# Altium PCB BEE-DAL_EXP.PcbDoc (part 5 of 5)
Units mm, origin at the board's own origin, x right, y up, seen from the top; angles counter-clockwise.
Board outline 93 x 90 mm, 6 copper layers (L1 TOP, L2 GND, L3 SIGNAL, L4 PWR, L5 GND, L6 BOT), stack 1.516 mm thick; 548 components, 447 nets, 1827 pads, 1142 vias.
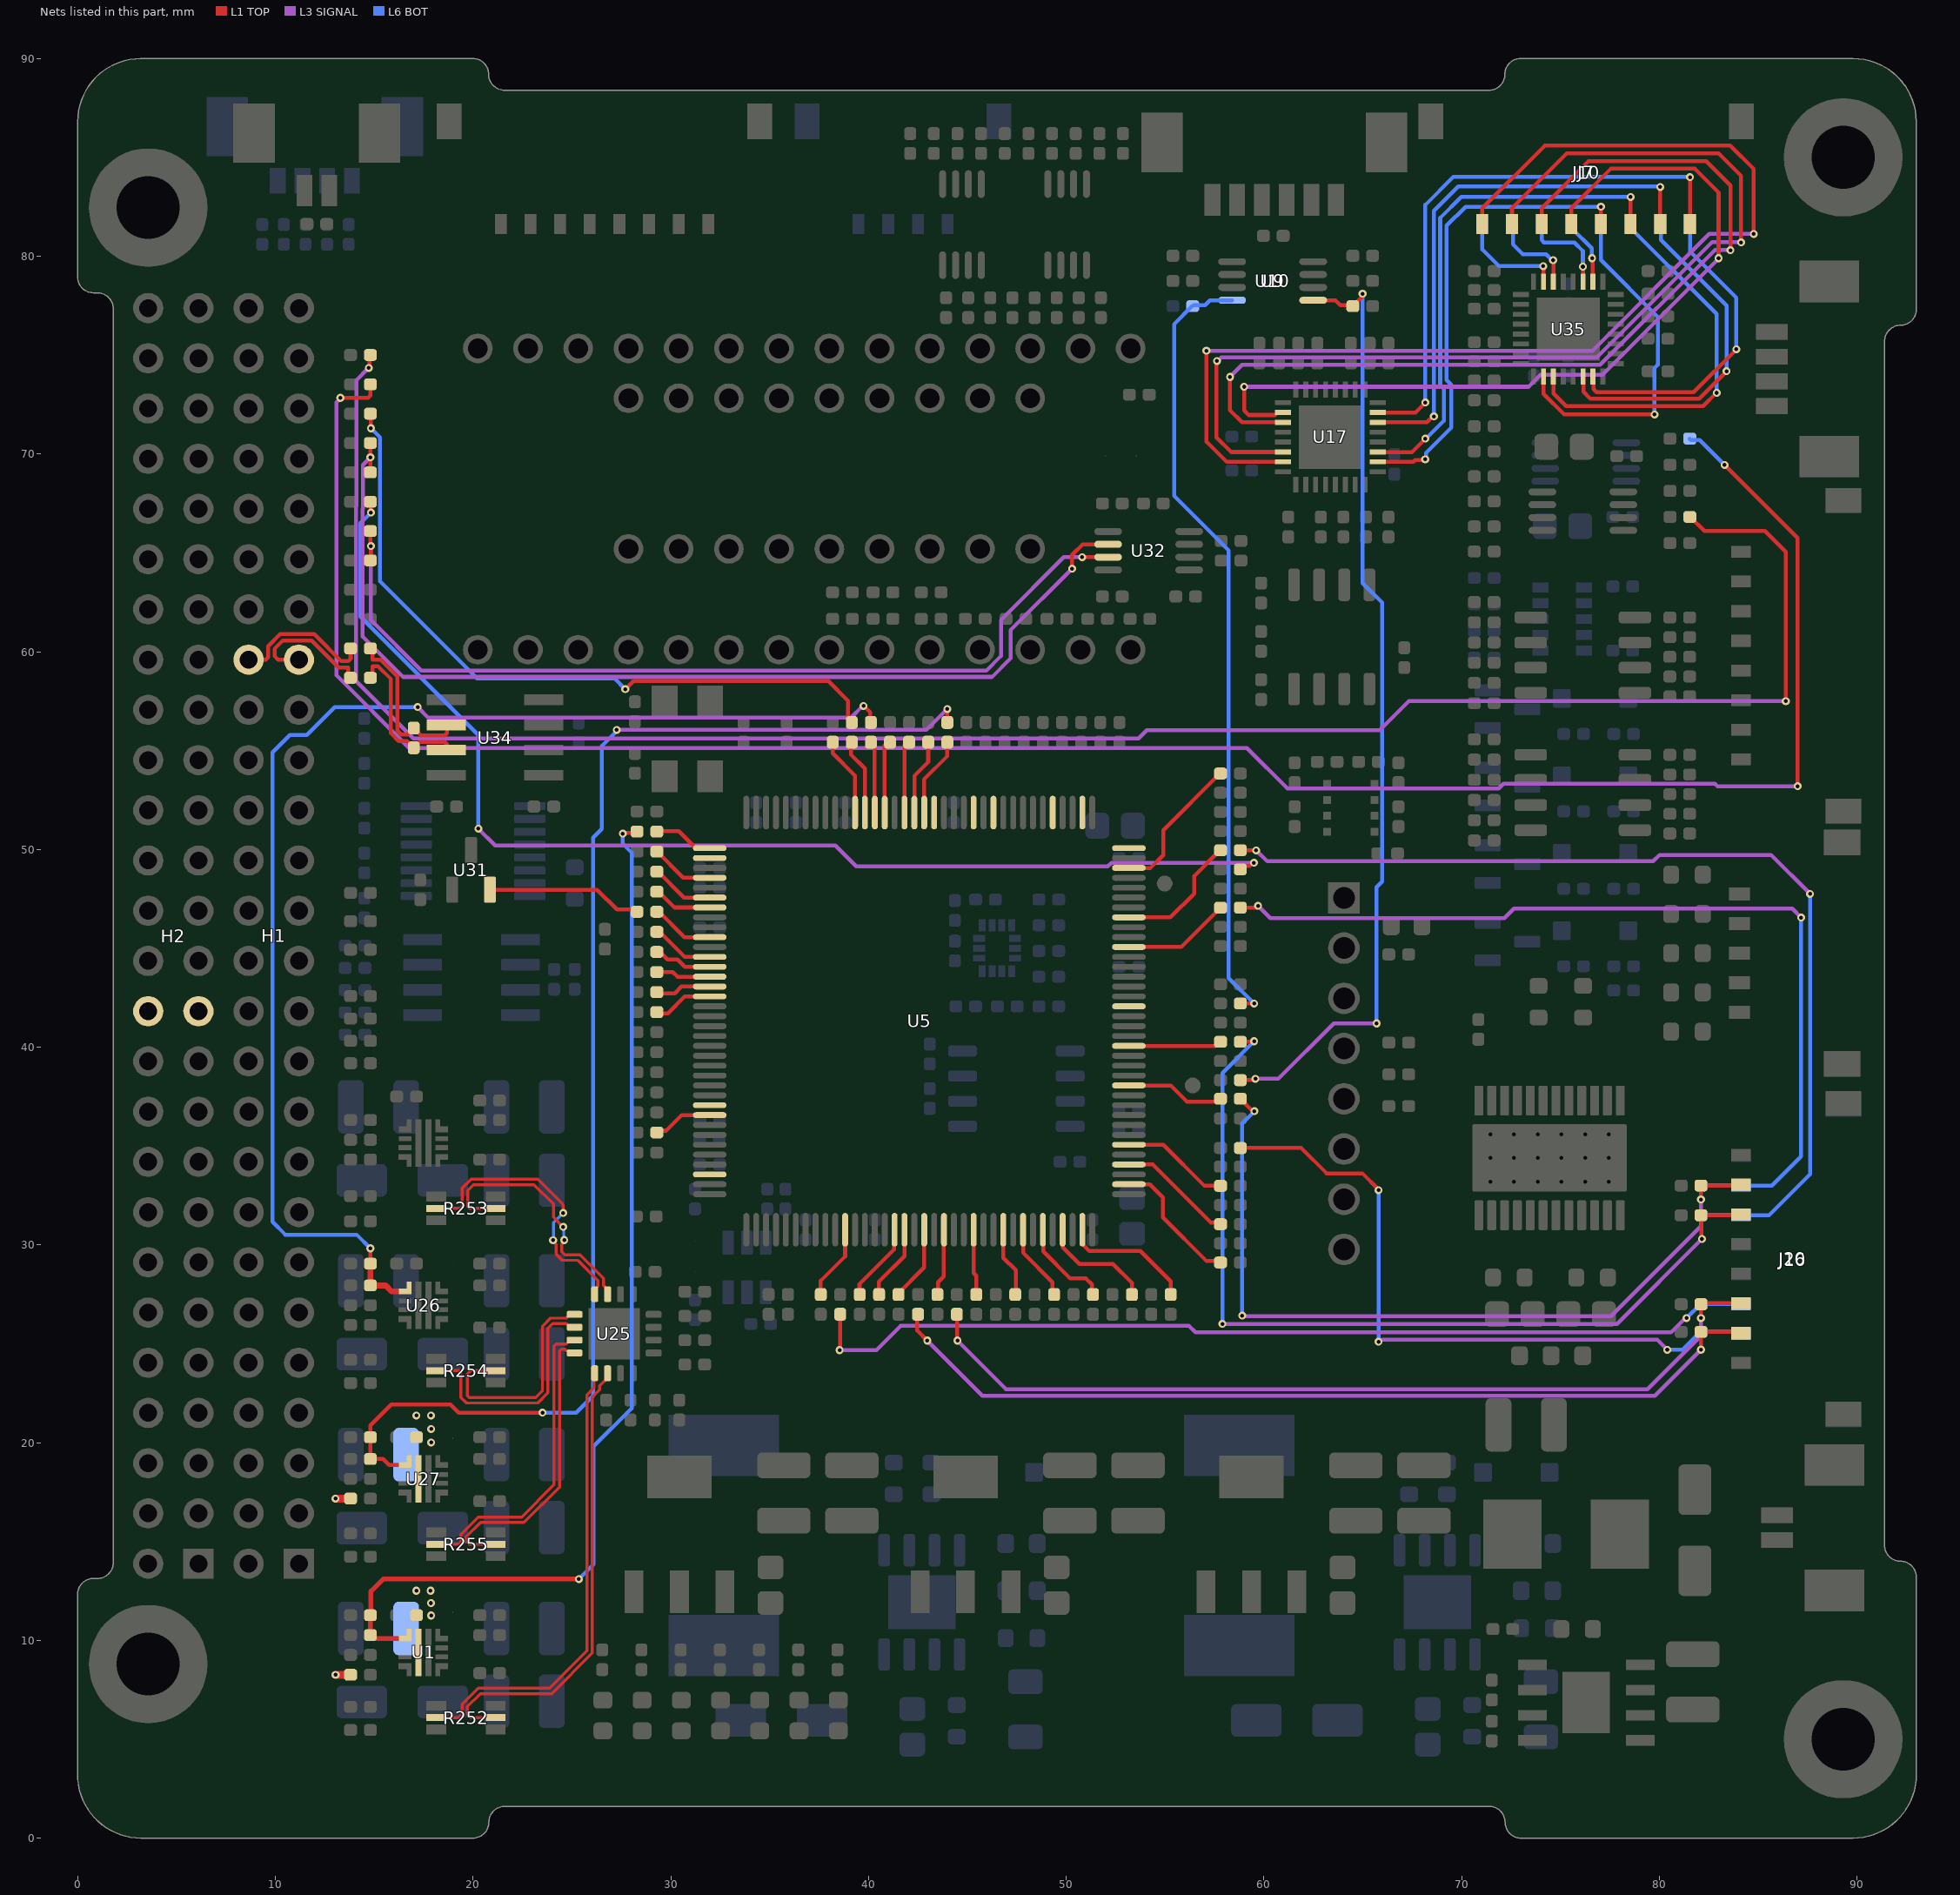
[diagram p9: the nets of this part, all layers, seen from the top]

## Via types
v1: diameter 0.4, hole 0.2, L1 TOP to L6 BOT, tented both sides, 1132 vias
v2: diameter 0.6, hole 0.3, L1 TOP to L6 BOT, tented both sides, 10 vias

## Nets (pads, with @x,y where several pads share a name; then routed paths per layer and width w, separated by ;. In a path a pad name is that pad's centre, name@x,y a point inside that pad or via, vN(x,y) a via of type N, cw(c..) or ccw(c..) an arc to the next point about the centre after c; other vN are vias at no path point) (continued)
PC23: R77.1 U5.127 | length 3.8
  L1 TOP w0.2: U5.127@42.322,51.864 42.322,53.722 43.023,54.423 R77.1@43.023,55.42
PC24: R107.1 U5.130 | length 3.6
  L1 TOP w0.2: U5.130@40.822,51.864 40.822,55.254 R107.1@40.987,55.42
PC25: R179.1 U5.133 | length 4
  L1 TOP w0.2: R179.1@38.19,55.42 38.19,54.863 39.322,53.731 U5.133@39.322,51.864
PC26: R110.1 U5.13 | length 3.1
  L1 TOP w0.2: R110.1@29.27,44.982 29.295,44.982 29.837,44.439 30.344,44.439 30.719,44.064 U5.13@31.972,44.064
PC27: R111.1 U5.12 | length 3.3
  L1 TOP w0.2: R111.1@29.27,45.972 29.295,45.972 30.702,44.564 U5.12@31.972,44.564
PC28: R308.1 U5.76 | length 5.9
  L1 TOP w0.2: U5.76@53.172,34.064 54.382,34.064 57.323,31.124 57.732,31.124 R308.1@57.808,31.048
PC29: R309.1 U5.16 | length 3
  L1 TOP w0.2: R309.1@29.295,41.714 29.854,41.714 30.704,42.564 U5.16@31.972,42.564
PC30: R310.1 U5.15 | length 2.8
  L1 TOP w0.2: R310.1@29.295,42.725 30.201,42.725 30.54,43.064 U5.15@31.972,43.064
PC31: R335.1 U5.14 | length 2.8
  L1 TOP w0.2: R335.1@29.295,43.803 30.106,43.803 30.344,43.564 U5.14@31.972,43.564
PC104_CAM1_EN: R304.1 R315.1 | length 112.8
  L1 TOP w0.2: v1(13.29,72.84) 14.688,72.84 14.805,72.958 R304.1@14.805,73.522 ; v1(83.3,69.447) 87,65.747 v1(87,53.2)
  L3 SIGNAL w0.2: v1(13.29,72.84) 13.29,72.813 13.1,72.623 13.1,58.8 16.768,55.132 59.138,55.132 61.195,53.075 71.882,53.075 72.128,53.321 82.815,53.321 82.936,53.2 v1(87,53.2)
  L6 BOT w0.2: R315.1@81.543,70.777 81.611,70.709 82.037,70.709 v1(83.3,69.447)
PC104_CAM2_EN: R305.1 R318.1 | length 104.2
  L1 TOP w0.2: v1(14.725,74.35) 14.763,74.388 14.763,74.965 R305.1@14.805,75.006 ; R318.1@81.543,66.817 81.568,66.817 82.285,66.1 85.35,66.1 86.4,65.05 v1(86.4,57.5)
  L3 SIGNAL w0.2: v1(14.725,74.35) 14.107,73.732 14.107,67.368 14.088,67.349 14.088,58.512 16.983,55.617 53.669,55.617 54.077,56.025 65.86,56.025 67.335,57.5 v1(86.4,57.5)
PC104_I2C_IRQ1: R101.2 R243.1 | length 60.2
  L1 TOP w0.2: R243.1@14.805,67.585 14.822,67.569 14.822,67.055 v1(14.838,67.038) ; R101.2@58.808,48.993 58.977,49.162 59.283,49.162 59.446,49.325 v1(59.5,49.325)
  L3 SIGNAL w0.2: v1(20.271,51.048) 21.119,50.2 38.322,50.2 39.382,49.139 52.107,49.139 52.293,49.325 v1(59.5,49.325)
  L6 BOT w0.2: v1(14.838,67.038) 14.3,66.5 14.3,61.766 20.271,55.795 v1(20.271,51.048)
PC104_I2C_IRQ2: R89.1 R245.1 | length 36.4
  L1 TOP w0.2: R245.1@14.805,72.038 14.822,72.021 14.822,71.317 v1(14.838,71.3) ; v1(27.7,58.1) 28.12,58.52 37.967,58.52 38.972,57.515 38.972,56.557 R89.1@39.109,56.42
  L6 BOT w0.2: v1(14.838,71.3) 15.3,70.838 15.3,63.55 20.192,58.658 27.142,58.658 v1(27.7,58.1)
PC104_I2C_SCL: R237.1 R244.2 U32.7 | length 47
  L1 TOP w0.2: R237.1@14.805,64.617 14.822,64.634 14.822,65.323 v1(14.838,65.339) ; v1@14.805,65.339 R244.2@14.805,66.101 ; v1(50.809,64.782) U32.7@52.123,64.782
  L3 SIGNAL w0.2: v1(14.838,65.339) 14.838,61.595 17.383,59.05 45.969,59.05 46.7,59.781 46.7,61.6 49.882,64.782 v1(50.809,64.782)
PC104_I2C_SDA: R238.1 R246.2 U32.6 | length 53.3
  L1 TOP w0.2: R238.1@14.805,69.069 v1(14.805,69.83) R246.2@14.805,70.552 ; v1(50.3,64.2) 50.295,64.205 50.295,64.895 50.832,65.432 U32.6@52.123,65.432
  L3 SIGNAL w0.2: v1(14.805,69.83) 14.432,69.457 14.432,67.233 14.413,67.214 14.413,60.768 16.456,58.725 46.255,58.725 47.2,59.67 47.2,61.1 v1(50.3,64.2)
PC104_RS485_N: H1.37 R239.2 | length 6.7
  L1 TOP w0.2: H1.37@11.19,59.6 10.137,59.6 9.957,59.78 9.957,60.141 10.377,60.56 11.834,60.56 13.199,59.195 13.688,59.195 13.688,58.797 R239.2@13.805,58.68
PC104_RS485_P: H1.38 R240.1 | length 7.2
  L1 TOP w0.2: H1.38@8.65,59.6 9.515,59.6 9.632,59.717 9.632,60.276 10.242,60.885 11.969,60.885 13.334,59.52 13.688,59.52 13.805,59.637 R240.1@13.805,60.164
PD00: R28.2 U5.1 | length 3.1
  L1 TOP w0.2: R28.2@29.27,50.927 30.409,50.927 31.272,50.064 U5.1@31.972,50.064
PD01: R89.2 U5.132 | length 3.9
  L1 TOP w0.2: R89.2@39.109,55.42 39.109,54.8 39.822,54.087 U5.132@39.822,51.864
PD02: R32.2 U5.131 | length 3.7
  L1 TOP w0.2: R32.2@40.048,55.42 40.048,55.368 40.302,55.114 40.302,51.884 U5.131@40.322,51.864
PD03: R34.2 U5.128 | length 3.6
  L1 TOP w0.2: U5.128@41.822,51.864 41.822,55.276 R34.2@41.965,55.42
PD04: R37.2 U5.126 | length 4
  L1 TOP w0.2: U5.126@42.822,51.864 42.822,53.553 43.99,54.721 R37.2@43.99,55.42
PD05: U5.125
PD06: U5.121
PD07: U5.119
PD08: U5.113
PD09: U5.110
PD10: R22.2 U5.101 | length 6.6
  L1 TOP w0.2: U5.101@53.172,46.564 55.274,46.564 56.47,47.76 56.47,48.649 57.783,49.962 R22.2@57.808,49.962
PD11: R38.2 U5.98 | length 5.5
  L1 TOP w0.2: U5.98@53.172,45.064 55.818,45.064 R38.2@57.808,47.055
PD12: U5.92
PD13: R39.2 U5.88 | length 4.7
  L1 TOP w0.2: U5.88@53.172,40.064 57.55,40.064 57.756,40.27 R39.2@57.808,40.27
PD14: R40.2 U5.84 | length 5
  L1 TOP w0.2: U5.84@53.172,38.064 55.296,38.064 56.112,37.248 R40.2@57.802,37.248
PD15: R54.2 U5.106 | length 7.4
  L1 TOP w0.2: U5.106@53.172,49.064 54.265,49.064 54.92,49.719 54.92,50.976 57.783,53.839 R54.2@57.808,53.839
PD16: R55.2 U5.78 | length 5.5
  L1 TOP w0.2: U5.78@53.172,35.064 54.916,35.064 56.994,32.986 R55.2@57.808,32.986
PD17: R56.2 U5.74 | length 6.8
  L1 TOP w0.2: U5.74@53.172,33.064 54.236,33.064 54.9,32.4 54.9,31.381 57.103,29.178 R56.2@57.739,29.178
PD18: R57.2 U5.69 | length 5.7
  L1 TOP w0.2: U5.69@49.822,30.764 49.841,30.745 49.841,29.873 50.674,29.039 52.361,29.039 53.324,28.076 R57.2@53.324,27.49
PD19: R59.1 U5.67 | length 4.8
  L1 TOP w0.2: U5.67@48.822,30.764 48.841,30.745 48.841,29.667 50.207,28.3 50.999,28.3 51.302,27.997 51.302,27.545 R59.1@51.357,27.49
PD20: R109.2 U5.65 | length 3.9
  L1 TOP w0.2: U5.65@47.822,30.764 47.822,29.599 49.304,28.117 49.304,27.576 R109.2@49.39,27.49
PD21: R323.2 U5.63 | length 3.5
  L1 TOP w0.2: U5.63@46.822,30.764 46.822,29.348 47.45,28.72 R323.2@47.45,27.49
PD22: R324.1 U5.60 | length 3.3
  L1 TOP w0.2: U5.60@45.322,30.764 45.322,28.571 45.456,28.437 R324.1@45.456,27.49
PD23: R64.2 U5.57 | length 3.4
  L1 TOP w0.2: R64.2@43.44,27.49 43.52,27.571 43.52,28.115 43.802,28.398 43.802,30.745 U5.57@43.822,30.764
PD24: R66.2 U5.55 | length 3.8
  L1 TOP w0.2: R66.2@41.481,27.49 41.481,27.515 42.822,28.856 U5.55@42.822,30.764
PD25: R68.2 U5.52 | length 4
  L1 TOP w0.2: R68.2@39.548,27.49 39.548,28.016 41.302,29.77 41.302,30.745 U5.52@41.322,30.764
PD26: R70.2 U5.53 | length 3.8
  L1 TOP w0.2: R70.2@40.529,27.49 40.529,28.141 41.822,29.434 U5.53@41.822,30.764
PD27: R72.2 U5.47 | length 3.8
  L1 TOP w0.2: R72.2@37.588,27.49 37.588,28.187 38.822,29.42 U5.47@38.822,30.764
PD28: R74.2 U5.71 | length 6.6
  L1 TOP w0.2: U5.71@50.822,30.764 50.841,30.745 50.841,30.015 51.166,29.689 53.749,29.689 55.291,28.148 R74.2@55.291,27.49
PD29: U5.108
PD30: U5.34
PD31: U5.2
PE00: R75.2 U5.4 | length 3.3
  L1 TOP w0.2: R75.2@29.27,49.934 29.27,49.927 30.633,48.564 U5.4@31.972,48.564
PE01: R83.2 U5.6 | length 3.3
  L1 TOP w0.2: R83.2@29.27,48.941 29.295,48.941 30.671,47.564 U5.6@31.972,47.564
PE02: R85.2 U5.7 | length 3.1
  L1 TOP w0.2: R85.2@29.27,47.951 29.295,47.951 30.182,47.064 U5.7@31.972,47.064
PE03: R306.2 U5.10 | length 3.3
  L1 TOP w0.2: R306.2@29.27,46.961 29.295,46.961 30.692,45.564 U5.10@31.972,45.564
PE04: U5.27
PE05: R76.2 U5.28 | length 3.1
  L1 TOP w0.2: R76.2@29.27,35.672 29.376,35.778 29.764,35.778 30.55,36.564 U5.28@31.972,36.564
PM-L25_1_DARK_ON: J20.3 R44.2 R63.1 | length 44.7
  L1 TOP w0.2: R44.2@44.472,26.49 44.486,26.477 44.486,25.174 v1(44.5,25.16) ; v1(82.109,26.3) R63.1@82.109,27 82.157,27.048 J20.3@84.13,27.048
  L3 SIGNAL w0.2: v1(44.5,25.16) 46.96,22.7 79.4,22.7 82.109,25.409 v1(82.109,26.3)
PM-L25_1_LIGHT_ON: J20.2 R42.2 R62.1 | length 45.7
  L1 TOP w0.2: R42.2@42.472,26.49 42.472,25.66 v1(42.972,25.16) ; v1(82.109,24.7) R62.1@82.109,25.598 84.08,25.598 J20.2@84.13,25.548
  L3 SIGNAL w0.2: v1(42.972,25.16) 45.757,22.375 79.784,22.375 v1(82.109,24.7)
PM-L25_2_DARK_ON: J20.7 R40.1 R67.1 | length 40.8
  L1 TOP w0.2: R40.1@58.808,37.39 59.437,36.761 v1(59.523,36.761) ; v1(82.109,32.3) R67.1@82.109,33 84.082,33 J20.7@84.13,33.048
  L3 SIGNAL w0.2: v1(58.901,26.425) 58.925,26.401 77.556,26.401 82.109,30.953 v1(82.109,32.3)
  L6 BOT w0.2: v1(58.901,26.425) 58.9,36.139 v1(59.523,36.761)
PM-L25_2_LIGHT_ON: J20.6 R39.1 R65.1 | length 45
  L1 TOP w0.2: R39.1@58.808,40.27 59.474,40.27 v1(59.504,40.3) ; v1(82.157,30.3) 82.133,30.324 82.133,31.476 R65.1@82.109,31.5 84.082,31.5 J20.6@84.13,31.548
  L3 SIGNAL w0.2: v1(57.9,26) 77.857,26 v1(82.157,30.3)
  L6 BOT w0.2: v1(57.9,26) 57.9,38.696 v1(59.504,40.3)
PM-U25_1_DARK_ON: J16.3 R22.1 R51.1 | length 50.6
  L1 TOP w0.2: R22.1@58.808,49.962 59.602,49.962 v1(59.609,49.955)
  L3 SIGNAL w0.2: v1(59.609,49.955) 60.164,49.4 79.687,49.4 80.012,49.725 85.652,49.725 v1(87.625,47.752)
  L6 BOT w0.2: R51.1@82.109,31.5 J16.3@84.13,31.5 85.55,31.5 87.625,33.575 v1(87.625,47.752)
PM-U25_1_LIGHT_ON: J16.2 R38.1 R50.1 | length 46.8
  L1 TOP w0.2: R38.1@58.808,47.055 59.614,47.055 v1(59.708,47.149)
  L3 SIGNAL w0.2: v1(59.708,47.149) 60.332,46.525 72.16,46.525 72.642,47.007 86.725,47.007 v1(87.175,46.557)
  L6 BOT w0.2: R50.1@82.109,33 J16.2@84.13,33 85.7,33 87.175,34.475 v1(87.175,46.557)
PM-U25_2_DARK_ON: J16.7 R49.2 R53.1 | length 34.6
  L1 TOP w0.2: R49.2@58.808,34.9 61.894,34.9 63.174,33.62 64.981,33.62 65.8,32.801 v1(65.8,32.768)
  L3 SIGNAL w0.2: v1(65.8,25.1) 65.854,25.1 65.954,25.2 79.897,25.2 v1(80.405,24.692)
  L6 BOT w0.2: v1(65.8,25.1) v1(65.8,32.768) ; v1(80.405,24.692) 80.413,24.7 81.186,24.7 82.084,25.598 R53.1@82.109,25.598 84.032,25.598 J16.7@84.13,25.5
PM-U25_2_LIGHT_ON: J16.6 R47.2 R52.1 | length 48.6
  L1 TOP w0.2: v1(38.541,24.678) 38.568,24.704 R47.2@38.568,26.49
  L3 SIGNAL w0.2: v1(38.541,24.678) 40.405,24.678 41.628,25.9 56.217,25.9 56.542,25.575 80.601,25.575 81.326,26.3 v1(81.38,26.3)
  L6 BOT w0.2: v1(81.38,26.3) 81.382,26.3 82.082,27 J16.6@84.13,27
POW_ONOFF_MOTOR: R37.1 R267.2 R272.1 U27.1 | length 67.7
  L1 TOP w0.2: U27.1@16.565,18.867 15.751,18.867 15.446,19.172 R272.1@14.805,19.172 R267.2@14.805,20.272 14.805,20.872 15.863,21.93 18.85,21.93 19.268,21.512 v1(23.51,21.512) ; R37.1@43.99,56.534 v1(43.99,57.105)
  L3 SIGNAL w0.2: v1(27.269,56.042) 42.928,56.042 v1(43.99,57.105)
  L6 BOT w0.2: v1(23.51,21.512) 25.212,21.512 26.075,22.375 26.075,50.603 26.509,51.037 26.509,55.229 27.269,55.988 v1(27.269,56.042)
POW_ONOFF_SLN_HD: R32.1 R259.2 R264.1 U26.1 | length 65.3
  L1 TOP w0.2: R259.2@14.805,29.051 v1(14.805,29.825) ; v1(39.748,57.254) 39.77,57.254 40.096,56.928 40.096,56.447 R32.1@40.123,56.42
  L1 TOP w0.3: R259.2@14.805,29.051 R264.1@14.805,27.951 15.58,27.951 15.885,27.646 U26.1@16.565,27.646
  L3 SIGNAL w0.2: v1(17.2,57.2) 17.725,56.675 39.123,56.675 39.702,57.254 v1(39.748,57.254)
  L6 BOT w0.2: v1(14.805,29.825) 14.113,30.517 10.503,30.517 9.85,31.17 9.85,54.9 10.744,55.794 11.594,55.794 13,57.2 v1(17.2,57.2)
POW_ONOFF_STX_12V: R1.2 R6.1 R28.1 U1.1 | length 54.6
  L1 TOP w0.2: v1(27.576,50.8) 27.614,50.838 28.181,50.838 R28.1@28.27,50.927
  L1 TOP w0.25: U1.1@16.565,10.091 15.02,10.091 14.844,10.268 R6.1@14.805,10.268 R1.2@14.805,11.273 14.835,11.303 14.835,12.475 15.46,13.1 v1(25.355,13.1)
  L6 BOT w0.2: v1(25.355,13.1) 26.1,13.845 26.1,19.814 28.02,21.734 28.02,49.836 27.576,50.28 v1(27.576,50.8)
RS_485_N: R239.1 R276.1 U34.7 | length 8.2
  L1 TOP w0.2: R239.1@14.805,58.68 14.922,58.797 14.922,59.272 15.192,59.272 15.85,58.613 15.85,55.87 16.233,55.487 16.651,55.487 16.998,55.14 R276.1@17,55.14 ; R276.1@17.006,55.134 17.307,55.435 18.568,55.435 18.685,55.318 U34.7@18.685,55.025
RS_485_P: R240.2 R276.2 U34.6 | length 8.3
  L1 TOP w0.2: R240.2@14.805,60.164 14.922,60.047 14.922,59.597 15.326,59.597 16.175,58.748 16.175,56.005 16.368,55.812 16.68,55.812 17,56.132 R276.2@17,56.14 17,56.13 17.37,55.76 18.568,55.76 18.685,55.877 U34.6@18.685,56.295
SENSE_5V_EXP_N: R253.4 U25.7 | length 13.4
  L1 TOP w0.15: R253.4@21.143,31.846 19.82,31.846 19.732,31.934 19.732,32.759 20.02,33.047 23.082,33.047 24.065,32.065 24.065,31.405 v1(24.56,30.91) ; v1(24.612,30.243) 24.612,30.175 24.485,30.048 24.485,29.644 24.632,29.497 25.406,29.497 26.595,28.308 26.595,27.946 26.808,27.733 U25.7@26.808,27.508
  L6 BOT w0.15: v1(24.56,30.91) 24.586,30.884 24.586,30.269 v1(24.612,30.243)
SENSE_5V_EXP_P: R253.3 U25.8 | length 14.3
  L1 TOP w0.15: R253.3@18.143,31.846 19.369,31.846 19.457,31.934 19.457,32.873 19.906,33.322 23.268,33.322 24.551,32.039 24.551,31.623 v1(24.56,31.614) ; v1(24.048,30.238) 24.048,30.187 24.21,30.025 24.21,29.53 24.518,29.222 25.292,29.222 26.32,28.194 26.32,27.902 26.158,27.74 U25.8@26.158,27.508
  L6 BOT w0.15: v1(24.048,30.238) 24.065,30.255 24.065,31.119 v1(24.56,31.614)
SENSE_5V_MOTOR_N: R255.4 U25.12 | length 15.3
  L1 TOP w0.15: R255.4@21.143,14.859 19.806,14.859 19.656,15.009 19.656,15.231 20.383,15.959 22.578,15.959 24.375,17.756 24.375,24.627 24.463,24.715 24.652,24.715 24.741,24.626 25.04,24.626 U25.12@25.133,24.533
SENSE_5V_MOTOR_P: R255.3 U25.11 | length 15.6
  L1 TOP w0.15: R255.3@18.143,14.859 19.293,14.859 19.381,14.947 19.381,15.345 20.269,16.234 22.464,16.234 24.1,17.87 24.1,24.88 24.21,24.99 24.708,24.99 24.901,25.183 U25.11@25.133,25.183
SENSE_5V_SLN_HD_N: R254.4 U25.9 | length 11.7
  L1 TOP w0.15: R254.4@21.143,23.638 19.893,23.638 19.718,23.463 19.718,22.368 19.806,22.28 23.163,22.28 23.51,22.627 23.51,25.883 23.921,26.294 24.711,26.294 24.901,26.483 U25.9@25.133,26.483
SENSE_5V_SLN_HD_P: R254.3 U25.10 | length 12
  L1 TOP w0.15: R254.3@18.143,23.638 19.268,23.638 19.381,23.525 19.381,22.285 19.662,22.005 23.277,22.005 23.785,22.513 23.785,25.769 24.035,26.019 24.72,26.019 24.905,25.833 U25.10@25.133,25.833
SENSE_12V_EXP_N: R252.4 U25.14 | length 23.8
  L1 TOP w0.15: R252.4@21.143,6.09 19.893,6.09 19.718,6.265 19.718,6.65 20.373,7.305 23.977,7.305 26.03,9.358 26.03,22.301 26.397,22.668 26.397,22.866 26.808,23.277 U25.14@26.808,23.508
SENSE_12V_EXP_P: R252.3 U25.13 | length 23.5
  L1 TOP w0.15: R252.3@18.143,6.09 19.268,6.09 19.443,6.265 19.443,6.764 20.259,7.58 23.863,7.58 25.755,9.472 25.755,22.415 26.122,22.782 26.122,23.473 U25.13@26.158,23.508
SENSOR1_EN: R88.2 R130.1 U9.5 | length 48.5
  L1 TOP w0.2: R88.2@58.808,38.332 59.453,38.332 59.521,38.4 v1(59.575,38.4) ; U9.5@62.495,77.775 63.619,77.775 63.875,77.519 64.456,77.519 R130.1@64.5,77.475 64.955,77.93 64.955,78.062 v1(64.993,78.1)
  L3 SIGNAL w0.2: v1(59.575,38.4) 60.735,38.4 63.535,41.2 v1(65.7,41.2)
  L6 BOT w0.2: v1(64.993,78.1) 64.993,63.468 65.975,62.486 65.975,48.368 65.7,48.093 v1(65.7,41.2)
SENSOR2_EN: R90.2 R133.1 U10.5 | length 40.2
  L1 TOP w0.2: R90.2@58.808,42.209 v1(59.504,42.209)
  L6 BOT w0.2: U10.5@58.395,77.775 57.276,77.775 57.025,77.524 56.449,77.524 R133.1@56.4,77.475 56.375,77.475 55.456,76.556 55.456,67.889 58.22,65.125 58.22,43.493 v1(59.504,42.209)
SOLE1_OUT1: J10.1 U17.31 | length 29
  L1 TOP w0.2: U17.31@65.771,72.1 67.668,72.1 v1(68.168,72.6) ; J10.1@81.55,81.63 v1(81.55,84)
  L6 BOT w0.2: v1(68.168,72.6) 68.168,82.598 69.595,84.025 81.525,84.025 v1(81.55,84)
SOLE1_OUT2: J10.2 U17.30 | length 27.2
  L1 TOP w0.2: U17.30@65.771,71.6 68.246,71.6 68.546,71.9 v1(68.6,71.9) ; J10.2@80.05,81.63 v1(80.05,83.5)
  L6 BOT w0.2: v1(68.6,71.9) 68.593,71.907 68.593,82.293 69.838,83.538 80.012,83.538 v1(80.05,83.5)
SOLE2_OUT1: J10.3 U17.27 | length 25.8
  L1 TOP w0.2: U17.27@65.771,70.1 65.774,70.096 67.489,70.096 v1(68.168,70.775) ; J10.3@78.55,81.63 v1(78.55,83)
  L6 BOT w0.2: v1(68.168,70.775) 68.193,70.775 69.1,71.682 69.1,73.3 68.918,73.482 68.918,81.937 69.982,83 v1(78.55,83)
SOLE2_OUT2: J10.4 U17.26 | length 24
  L1 TOP w0.2: U17.26@65.771,69.6 67.559,69.6 67.659,69.7 68.132,69.7 v1(68.159,69.727) ; J10.4@77.05,81.63 v1(77.05,82.5)
  L6 BOT w0.2: v1(68.159,69.727) 68.197,69.765 68.197,70.057 69.475,71.335 69.475,73.507 69.243,73.738 69.243,81.543 70.2,82.5 v1(77.05,82.5)
SOLE3_OUT1: J10.5 U17.10 | length 42.9
  L1 TOP w0.2: v1(59,73.4) 59,72.2 59.23,71.97 60.561,71.97 60.691,72.1 U17.10@60.97,72.1 ; J10.5@75.55,81.63 75.55,82.43 77.545,84.425 81.799,84.425 83,83.224 v1(83,79.9)
  L3 SIGNAL w0.2: v1(59,73.4) 73.4,73.4 74,74 77.125,74 83,79.875 v1(83,79.9)
SOLE3_OUT2: J10.6 U17.11 | length 47.7
  L1 TOP w0.2: v1(58.287,73.897) 58.287,72.213 58.9,71.6 U17.11@60.97,71.6 ; J10.6@74.05,81.63 74.05,82.43 76.42,84.8 82.376,84.8 83.6,83.576 v1(83.6,80.3)
  L3 SIGNAL w0.2: v1(58.287,73.897) 58.902,74.512 77.011,74.512 82.824,80.325 83.575,80.325 v1(83.6,80.3)
SOLE4_OUT1: J10.7 U17.14 | length 53.9
  L1 TOP w0.2: v1(57.625,74.7) 57.6,74.675 57.6,70.842 58.342,70.1 U17.14@60.97,70.1 ; J10.7@72.55,81.63 72.55,82.43 75.32,85.2 83.001,85.2 84.142,84.058 v1(84.142,80.7)
  L3 SIGNAL w0.2: v1(57.625,74.7) 57.667,74.7 57.842,74.875 76.835,74.875 82.685,80.725 84.117,80.725 v1(84.142,80.7)
SOLE4_OUT2: J10.8 U17.15 | length 58.6
  L1 TOP w0.2: v1(57.093,75.218) 57.093,70.625 58.119,69.6 U17.15@60.97,69.6 ; J10.8@71.05,81.63 71.05,82.43 74.22,85.6 83.584,85.6 84.78,84.404 v1(84.78,81.13)
  L3 SIGNAL w0.2: v1(57.093,75.218) 76.621,75.218 82.533,81.13 v1(84.78,81.13)
SOLE5_OUT1: J7.1 U35.31 | length 5.5
  L1 TOP w0.2: v1(74.127,79.496) 74.135,79.488 74.135,78.725 U35.31@74.143,78.717
  L6 BOT w0.2: J7.1@71.05,81.63 71.05,80.35 71.904,79.496 v1(74.127,79.496)
SOLE5_OUT2: J7.2 U35.30 | length 4.4
  L1 TOP w0.2: v1(74.629,79.803) 74.643,79.788 U35.30@74.643,78.717
  L6 BOT w0.2: J7.2@72.6,81.5 72.603,81.497 72.603,80.597 73.1,80.1 74.277,80.1 74.575,79.803 v1(74.629,79.803)
SOLE6_OUT1: J7.3 U35.27 | length 4.7
  L1 TOP w0.2: v1(76.135,79.471) 76.139,79.467 76.139,78.721 U35.27@76.143,78.717
  L6 BOT w0.2: J7.3@74.05,81.63 74.053,81.627 74.053,80.822 74.174,80.7 75.7,80.7 76.135,80.265 v1(76.135,79.471)
SOLE6_OUT2: J7.4 U35.26 | length 3.4
  L1 TOP w0.2: v1(76.6,79.9) 76.622,79.878 76.622,78.738 U35.26@76.643,78.717
  L6 BOT w0.2: J7.4@75.55,81.63 75.55,81.43 76.58,80.4 76.58,79.92 v1(76.6,79.9)
SOLE7_OUT1: J7.5 U35.10 | length 17.8
  L1 TOP w0.2: U35.10@74.143,73.916 74.143,73.04 75.187,71.997 v1(79.76,71.997)
  L6 BOT w0.2: J7.5@77.05,81.63 77.05,79.805 79.935,76.921 79.935,74.519 79.76,74.344 v1(79.76,71.997)
SOLE7_OUT2: J7.6 U35.11 | length 20
  L1 TOP w0.2: U35.11@74.643,73.916 74.643,73.062 75.284,72.422 82.222,72.422 82.891,73.091 v1(82.909,73.091)
  L6 BOT w0.2: J7.6@78.55,81.63 78.55,81.43 82.9,77.08 82.9,73.1 v1(82.909,73.091)
SOLE8_OUT1: J7.7 U35.14 | length 17.3
  L1 TOP w0.2: U35.14@76.143,73.916 76.17,73.889 76.17,73.14 76.511,72.799 82.016,72.799 v1(83.4,74.183)
  L6 BOT w0.2: J7.7@80.08,81.4 80.08,80.82 83.4,77.5 v1(83.4,74.183)
SOLE8_OUT2: J7.8 U35.15 | length 16.2
  L1 TOP w0.2: U35.15@76.643,73.916 76.67,73.889 76.67,73.278 76.825,73.124 81.74,73.124 83.9,75.284 v1(83.9,75.3)
  L6 BOT w0.2: J7.8@81.55,81.63 81.55,80.25 83.9,77.9 v1(83.9,75.3)
STX_12V: C3.2 C4.2 C130.2 C131.2 H2.23 H2.24 JP1.1 JP11.1 R2.2 R268.2 U1.5 U27.5 | length 1.5
  L1 TOP w0.4: v1(13.04,17.172) R268.2@13.805,17.172 ; v1(13.045,8.258) R2.2@13.805,8.258
  other v1: 17.878,11.258 17.87,11.884 17.13,12.51 17.85,12.51 17.878,20.009 17.878,20.69 17.13,21.371 17.87,21.371
"TEMP _SENSOR": R306.1 U31.2 | length 7.8
  L1 TOP w0.2: U31.2@20.85,47.962 26.273,47.962 27.274,46.961 R306.1@28.27,46.961
pads on no net: H1.02 H1.04 H1.05 H1.06 H1.07 H1.08 H1.09 H1.10 H1.11 H1.12 H1.13 H1.14 H1.15 H1.16 H1.17 H1.18 H1.19 H1.20 H1.28 H1.29 H1.30 H1.31 H1.32 H1.33 H1.34 H1.35 H1.36 H1.40 H1.42 H1.48 H1.50 H1.51 H1.52 H2.01 H2.02 H2.03 H2.04 H2.05 H2.06 H2.07 H2.08 H2.09 H2.10 H2.11 H2.12 H2.13 H2.14 H2.15 H2.16 H2.17 H2.18 H2.19 H2.20 H2.21 H2.22 H2.27 H2.28 H2.33 H2.34 H2.35 H2.36 H2.37 H2.38 H2.39 H2.40 H2.41 H2.42 H2.43 H2.44 H2.45 H2.46 H2.49 H2.50 H2.51 H2.52 J2.1 J2.7 J4.6 J5.6 U4.7 U4.9 U5.136 U5.137 U7.8 U7.10 U11.1 U11.2 U11.4 U11.5 U11.6 U11.17 U11.18 U14.4 U14.10 U14.11 U15.23 U15.24 U15.25 U15.26 U17.8 U17.17 U18.4 U19.4 U20.17 U20.18 U33.2 U33.3 U33.5 U35.8 U35.17

## Polygon pours and split planes (outlines as drawn)
GND on L1 TOP "NONET_L-01_P-001" (solid, pour order 231): 70.928,36.1 70.1,36.1 70.1,39.6 68.064,39.6 68.064,36.032 66.601,36.032 66.601,31.1 68.136,31.1 68.136,25.6 70.4,25.6 70.4,28.866 71.101,29.567 71.101,32.561 71.24,32.7 77.781,32.7 77.818,32.663 77.818,30.766 80.2,30.766 80.2,34.6 81,35.4 84.8,35.4 85.6,35.4 85.6,38.2 77.984,38.2 77.801,38.017 77.801,36.606 77.801,36.1
5V_MOTOR on L1 TOP "NONET_L-01_P-001" (solid, pour order 220): 61.2,13.536 62.611,13.536 63.447,12.7 68.46,12.7 70.7,14.94 70.7,17.418 73.382,20.1 73.382,22.113 71.792,23.703 71.792,24.8 71.992,25 73.382,25 73.534,24.849 73.534,23.762 73.795,23.5 83.382,23.5 83.63,23.748 83.63,24.348 84.63,24.348 85.1,24.818 85.1,29.648 85,29.748 83.63,29.748 83.63,30.348 84.648,30.348 85,30.7 85,34.848 86.2,34.848 86.2,23.7 84.1,21.6 78.469,21.6 74.682,17.813 74.682,13.682 73.78,12.78 72.1,11.1 72.1,7.49 70.331,7.49 66.92,10.9 61.2,10.9
12V_MOTOR on L1 TOP "NONET_L-01_P-001" (solid, pour order 206): 75.459,24.671 75.787,25 79.7,25 79.7,23.787 75.459,23.787
12V/5V_MOTOR on L1 TOP "NONET_L-01_P-001" (solid, pour order 203): 72.601,32.217 72.601,26.091 73.949,24.743 73.949,23.787 75.1,23.787 75.1,24.782 76.301,25.983 76.301,30.1 76.301,32.217 76.268,32.25 75.907,32.25 75.851,32.194 75.851,29.9 75.451,29.5 73.507,29.5 73.051,29.956 73.051,30.806 73.051,32.217 73.018,32.25 72.634,32.25
NetC19_1 on L1 TOP "NONET_L-01_P-001" (solid, pour order 202): 83.049,14.529 82.216,15.362 80.252,15.362 79.49,16.124 79.49,17.3 75.6,17.3 75.6,10.581 77.694,8.487 79.764,8.487 79.764,11.001 80.763,12 83.049,12
12V_MOTOR on L1 TOP "NONET_L-01_P-001" (solid, pour order 117): 80.133,7.196 80.844,7.906 cw(c81.215,7.536) 81.215,8.06 84.33,8.06 84.33,11.3 80.196,11.3 80.196,8.882 cw(c79.587,8.882) 80.017,8.451 79.851,8.285 cw(c79.525,8.611) 79.525,8.15 78.25,8.15 ccw(c78.25,8.01) 78.11,8.01 78.11,7.341 ccw(c78.376,7.341) 78.376,7.076 79.844,7.076 ccw(c79.844,7.485)
GND on L1 TOP "NONET_L-01_P-001" (solid, pour order 118): 78.304,5.947 79.958,5.947 cw(c79.958,5.219) 80.473,5.733 80.841,5.365 ccw(c81.481,6.005) 81.481,5.1 82.783,5.1 ccw(c82.783,5.885) 83.338,5.33 83.421,5.413 ccw(c82.892,5.941) 83.64,5.941 83.64,6.931 ccw(c83.203,6.933) 83.203,7.37 80.951,7.37 ccw(c80.951,6.649) 80.441,7.159 79.809,6.527 cw(c79.696,6.64) 79.696,6.48 78.304,6.48
5V_EXP on L1 TOP "NONET_L-01_P-001" (solid, pour order 124): 46.735,13.533 46.735,11.383 48.559,11.383 cw(c48.559,11.122) 48.744,11.306 48.789,11.261 ccw(c49.515,11.987) 49.515,10.96 51.15,10.96 ccw(c51.15,11.15) 51.34,11.15 51.34,12.54 ccw(c51.096,12.54) 51.096,12.784 48.961,12.784 cw(c48.961,14.056) 48.061,13.156 47.685,13.533
BUS_5V on L1 TOP "NONET_L-01_P-001" (solid, pour order 130): 17.388,33.937 17.088,33.937 17.088,36.445 16.64,36.893 16.64,40.03 19.469,40.03 19.469,37.695 18.492,36.718 17.557,36.718 17.388,36.548
3.3V_MCU on L1 TOP "L1 TOP-3.3V_MCU" (solid, pour order 136): 49.614,17.85 54.386,17.85 ccw(c54.386,18.438) 54.974,18.438 54.974,20.766 ccw(c54.58,20.766) 54.58,21.16 48.662,21.16 ccw(c48.662,20.037) 47.867,20.831 47.473,20.437 cw(c44.816,23.094) 44.816,19.336 43.288,19.336 43.288,15.421 ccw(c45.062,15.421) 43.808,14.167 44.066,13.909 cw(c43.168,13.01) 44.438,13.01 44.438,11.386 45.388,11.386 45.388,12.957 cw(c46.806,12.957) 45.542,13.598 ccw(c42.467,16.673) 46.675,15.578 cw(c49.614,14.814)
GND on L1 TOP "NONET_L-01_P-001" (solid, pour order 188): 52.737,13.087 54.986,15.336 54.986,16.558 54.841,16.703 48.985,16.703 48.841,16.558 48.841,15.547 48.841,13.358 49.112,13.087
GND on L1 TOP "NONET_L-01_P-001" (solid, pour order 189): 63.302,16.261 63.302,16.558 63.447,16.703 69.303,16.703 69.447,16.558 69.447,15.65 69.447,15.17 68.806,14.528 66.771,14.528 65.33,13.087 63.573,13.087 63.327,13.333
GND on L1 TOP "NONET_L-01_P-001" (solid, pour order 187): 40.127,13.087 40.512,13.472 40.512,16.456 40.265,16.703 34.511,16.703 34.367,16.558 34.367,15.547 34.439,15.475 34.392,15.427 34.392,13.333 34.638,13.087
3.3V_MOTOR on L1 TOP "L1 TOP-3.3V_MCU" (solid, pour order 162): 62.334,17.186 62.998,17.85 69.436,17.85 69.436,20.62 62.118,20.62 60.836,19.337 60.837,19.336 57.75,19.336 57.75,14.686 58.9,13.536 58.9,11.386 59.85,11.386 59.85,13.544 61,14.694 61,17.186
3.3V_COM on L1 TOP "L1 TOP-3.3V_COM" (solid, pour order 135): 33.399,17.186 34.415,18.203 39.563,18.203 ccw(c39.563,19.14) 40.5,19.14 40.5,21.4 ccw(c39.65,21.4) 39.65,22.25 34.813,22.25 31.9,19.337 31.901,19.336 28.814,19.336 28.814,14.686 29.964,13.536 29.964,11.386 30.914,11.386 30.914,13.544 32.064,14.694 32.064,17.186
5V_EXP on L1 TOP "NONET_L-01_P-001" (solid, pour order 132): 20.643,32.696 22.904,32.696 cw(c22.904,32.22) 23.38,32.22 23.38,30.225 cw(c22.682,30.225) 23.176,29.731 cw(c22.619,30.288) 22.619,29.501 20.309,29.501 ccw(c20.309,28.492) 19.596,29.205 19.367,28.976 cw(c18.266,30.077) 18.266,28.52 16.815,28.52 16.64,28.695 16.64,29.744 16.802,29.906 cw(c17.656,29.053) 17.656,30.26 18.189,30.26 ccw(c18.189,31.519) 19.08,30.629 19.457,31.006 cw(c20.641,29.822) 20.641,31.496 21.836,31.496 ccw(c21.836,31.667) 22.007,31.667 22.007,31.952 ccw(c21.762,31.952) 21.762,32.196 20.643,32.196
efuse_BUS_5V on L1 TOP "NONET_L-01_P-001" (solid, pour order 122): 17.588,36.349 17.588,33.764 16.595,32.771 14.387,32.771 14.305,32.689 14.305,30.896 18.643,30.896 18.643,31.496 17.443,31.496 17.443,32.196 18.643,32.196 18.643,32.708 17.888,33.464 17.888,36.349
5V_SLN_HD on L1 TOP "NONET_L-01_P-001" (solid, pour order 129): 20.643,23.988 20.643,24.488 23.122,24.488 23.18,24.43 23.18,22.909 23.058,22.788 20.643,22.788 20.643,23.288 21.843,23.288 21.843,23.988
12V_MOTOR on L1 TOP "NONET_L-01_P-001" (solid, pour order 131): 20.643,15.709 22.741,15.709 23.01,15.44 23.01,14.009 20.643,14.009 20.643,14.509 21.843,14.509 21.843,15.209 20.643,15.209
efuse_STX_12V on L1 TOP "NONET_L-01_P-001" (solid, pour order 91): 17.588,10.592 17.588,8.008 16.52,6.94 14.312,6.94 14.305,6.933 14.305,5.185 14.86,4.63 18.643,4.63 18.643,5.74 17.443,5.74 17.443,6.44 18.643,6.44 18.643,6.952 17.888,7.708 17.888,10.592
5V_SLN_HD_eFuse on L1 TOP "NONET_L-01_P-001" (solid, pour order 103): 17.588,28.14 17.588,25.555 16.52,24.488 14.312,24.488 14.305,24.48 14.305,22.733 14.838,22.2 18.552,22.2 18.643,22.291 18.643,23.288 17.443,23.288 17.443,23.988 18.643,23.988 18.643,24.5 17.888,25.255 17.888,28.14
5V_EXP on L1 TOP "NONET_L-01_P-001" (solid, pour order 125): 32.261,13.533 32.261,11.383 34.085,11.383 cw(c34.085,11.122) 34.27,11.306 34.315,11.261 ccw(c35.041,11.987) 35.041,10.96 39.63,10.96 39.63,12.784 34.487,12.784 cw(c34.487,14.056) 33.587,13.156 33.211,13.533
5V_EXP on L1 TOP "NONET_L-01_P-001" (solid, pour order 104): 17.388,25.739 17.088,25.739 17.088,28.247 16.64,28.695 16.64,29.571 cw(c17.056,29.571) 17.056,29.988 18.3,29.988 18.516,29.771 18.516,28.545 18.492,28.52 17.557,28.52 17.388,28.351
STX_12V on L1 TOP "NONET_L-01_P-001" (solid, pour order 102): 17.388,16.96 17.088,16.96 17.088,19.468 16.64,19.916 16.64,21.6 18.516,21.6 18.516,19.766 18.492,19.741 17.557,19.741 17.388,19.572
12V_MOTOR_eFuse on L1 TOP "NONET_L-01_P-001" (solid, pour order 101): 17.588,19.361 17.588,16.776 16.52,15.709 14.312,15.709 14.305,15.701 14.305,13.954 14.835,13.423 18.555,13.423 18.643,13.512 18.643,14.509 17.443,14.509 17.443,15.209 18.643,15.209 18.643,15.721 17.888,16.476 17.888,19.361
STX_12V on L1 TOP "NONET_L-01_P-001" (solid, pour order 94): 17.388,8.191 17.088,8.191 17.088,10.7 16.619,11.168 16.619,12.77 18.516,12.77 18.516,10.997 18.492,10.973 17.557,10.973 17.388,10.803
12V_EXP on L1 TOP "NONET_L-01_P-001" (solid, pour order 87): 20.643,6.94 22.66,6.94 cw(c22.66,6.512) 23.088,6.512 23.088,4.618 cw(c22.69,4.618) 22.69,4.22 20.952,4.22 cw(c20.952,4.529) 20.643,4.529
3.3V_MCU on L4 PWR (solid, pour order 235): 62.7,40.496 68.3,40.496 68.3,41.47 69.93,43.1 76.7,43.1 76.7,55.7 79.3,58.3 84.25,58.3 86.2,60.25 86.2,65.8 88.5,65.8 88.5,80.207 82.907,85.8 19.5,85.8 15.9,82.2 7.981,82.2 7.5,81.719 7.5,79.5 7.9,79.1 11.6,79.1 14.838,75.862 14.838,48.589 18.188,45.239 18.188,52.505 18.382,52.7 26.3,52.7 26.5,52.5 26.5,26.7 30.8,22.4 39.85,22.4 40,22.25 40,18.027 40.127,17.9 51.94,17.9 55,20.96 55,48.273 42.015,61.258 42.015,76.163 46.451,80.6 54.6,80.6 54.6,76.163 68.811,76.163 73.248,80.6 79.5,80.6 79.5,72.6 67.275,72.6 67.275,67 54.75,67 54.75,61.614 62.7,53.664
5V_SLN_HD on L4 PWR (solid, pour order 233): 22.1,23.1 31.6,13.6 54.931,13.6 ccw(c54.931,14.854) 55.817,13.967 61.5,19.65 61.5,51.257 52.51,60.247 52.51,63.353 54.5,63.353 54.5,67.175 67,67.175 67,72.8 67.1,72.9 79.3,72.9 79.3,80.4 73.3,80.4 68.9,76 54.5,76 54.5,80.5 46.6,80.5 42.2,76.1 42.2,61.4 55.16,48.44 55.16,20.66 52.18,17.68 31.22,17.68 22.1,26.8
12V_EXP on L4 PWR "L4 PWR-12V_EXP" (solid, pour order 218): 21.135,3.6 86.04,3.6 86.04,6.24 89.1,9.3 89.1,65.2 88.7,65.6 86.4,65.6 86.4,60.2 85.25,59.05 84.3,58.1 79.4,58.1 76.9,55.6 76.9,42.8 83.3,36.4 83.3,14.61 83.3,10.3 79.94,6.94 22.33,6.94 21.73,6.94 ccw(c21.73,6.346) 21.135,6.345
5V_EXP on L4 PWR "L4 PWR-5V_EXP" (solid, pour order 227): 13.4,68.8 13.4,48.3 20.7,41 20.7,31.4 15.1,31.4 15.1,25.38 23.48,17 23.48,12.17 25.15,10.5 52.359,10.5 54.238,10.5 62.6,18.862 62.6,53.517 54.5,61.617 54.5,63.13 52.83,63.13 52.73,63.029 52.73,60.18 61.661,51.248 61.661,19.561 55.37,13.27 31.651,13.27 22.007,22.914 22.007,30.895 22.007,41.193 14.5,48.7 14.5,68.8
BUS_5V on L4 PWR "NONET_L-01_P-001" (solid, pour order 121): 2.19,43.33 2.19,48.4 13.15,48.4 20.6,40.95 20.6,31.6 15.1,31.6 15.1,40.22 11.99,43.33
3.3V_MOTOR on L4 PWR "L4 PWR-3.3V_MOTOR" (solid, pour order 222): 70.5,19.5 73.6,22.6 73.6,25 83.1,25 83.1,36.27 76.57,42.8 70,42.8 68.6,41.4 68.6,40.2 62.8,40.2 62.8,19.5
3.3V_COM on L4 PWR "L4 PWR-3.3V_COM" (solid, pour order 184): 22.26,27.14 31.5,17.9 39.78,17.9 39.78,21.73 ccw(c39.26,21.73) 39.26,22.25 34.367,22.25 30.72,22.25 26.3,26.67 26.3,52.5 18.73,52.5 18.3,52.5 18.3,45.2 22.26,41.24
12V_MOTOR on L4 PWR "L4 PWR-12V_MOTOR" (solid, pour order 208): 21.6,7.22 79.789,7.22 83.1,10.531 83.1,24.692 79.2,24.692 73.8,24.707 73.8,22.5 70.5,19.2 63.259,19.2 54.309,10.25 24.85,10.25 23.24,11.86 23.24,17.18 21.6,17.18
STX_12V on L4 PWR "NONET_L-01_P-001" (solid, pour order 120): 2.19,43 11.995,43 14.805,40.19 14.805,25.342 21.4,18.747 21.4,7.133 11.327,7.133 cw(c11.327,9.837) 9.415,7.925 7.81,9.53 3.039,14.301 cw(c5.09,16.351) 2.19,16.351
IR_LED_2_P on L6 BOT "L6 BOT-IR_LED_2_P" (solid, pour order 157): 66.902,17.107 67.019,16.99 68.039,16.99 cw(c68.039,16.212) 68.59,16.762 cw(c67.327,15.499) 69.114,15.498 69.114,13.885 ccw(c69.261,13.885) 69.157,13.781 ccw(c69.261,13.885) 69.261,13.738 69.617,13.738 69.704,13.824 69.704,15.23 69.712,15.238 69.712,16.19 69.937,16.414 72.675,16.414 ccw(c72.675,17.542) 73.472,16.744 74.543,17.815 cw(c74.834,17.524) 75.056,17.871 cw(c74.562,17.097) 75.213,17.745 75.35,17.608 cw(c74.772,17.029) 75.59,17.028 75.59,9.719 cw(c74.817,9.719) 75.363,9.172 74.949,8.758 cw(c74.412,9.294) 74.412,8.535 73.592,8.535 73.243,8.535 73.139,8.431 73.139,7.389 73.243,7.285 76.385,7.285 ccw(c76.385,7.53) 76.63,7.53 76.63,17.949 ccw(c76.081,17.95) 76.469,18.338 76.059,18.748 ccw(c75.532,18.223) 75.531,18.967 74.019,18.967 72.69,17.638 cw(c72.092,18.236) 72.091,17.39 70.196,17.39 69.796,17.79 67.019,17.79 66.902,17.673
12V_EXP on L6 BOT "L6 BOT-12V_EXP 2" (solid, pour order 105): 62.447,4.509 ccw(c63.098,4.509) 63.098,3.858 65.91,3.858 67.03,3.858 ccw(c67.03,4.218) 67.39,4.218 67.39,5.378 cw(c67.94,5.378) 67.94,5.928 71.3,5.928 cw(c71.3,5.718) 71.51,5.718 71.51,4.868 ccw(c71.893,4.868) 71.893,4.485 74.645,4.485 ccw(c74.645,4.729) 74.817,4.557 ccw(c74.645,4.729) 74.889,4.729 74.889,5.491 ccw(c74.646,5.492) 74.817,5.664 ccw(c74.646,5.493) 74.645,5.735 cw(c74.645,5.894) 74.532,5.782 73.634,6.68 ccw(c72.554,5.601) 72.553,7.128 71.506,7.128 cw(c71.506,7.89) 70.968,7.351 69.899,8.419 cw(c70.372,8.892) 69.704,8.892 69.704,10.021 69.617,10.108 69.2,10.108 69.114,10.021 69.114,8.892 cw(c68.1,8.892) 68.817,8.175 68.059,7.417 cw(c67.673,7.803) 67.673,7.257 63.018,7.257 ccw(c63.018,6.686) 62.447,6.686
IR_LED_1_GND on L6 BOT "L6 BOT-IR_LED_1_GND" (solid, pour order 154): 29.886,18.305 43.781,18.305 cw(c43.782,17.756) 44.17,18.144 ccw(c44.784,18.758) 44.784,17.89 45.511,17.89 ccw(c45.511,19.093) 46.363,18.243 47.131,19.011 cw(c47.611,18.532) 47.611,19.21 49.949,19.21 cw(c49.95,18.702) 50.309,19.061 51.136,18.234 cw(c50.523,17.621) 51.39,17.62 51.39,8.539 53.91,8.539 53.91,9.172 52.2,9.172 52.2,18.363 ccw(c51.629,18.363) 52.032,18.768 50.92,19.88 ccw(c50.462,19.422) 50.461,20.07 40.633,20.07 37.346,20.07 cw(c37.346,21.369) 36.427,20.451 35.474,21.404 29.886,21.404
IR_LED_2_GND on L6 BOT "L6 BOT-IR_LED_2_GND" (solid, pour order 164): 71.7,19.518 71.7,17.89 70.856,17.89 cw(c70.856,18.758) 70.242,18.144 ccw(c69.854,17.757) 69.853,18.305 55.958,18.305 55.958,21.404 61.546,21.404 63.148,19.802 ccw(c63.834,20.488) 63.834,19.518
5V_EXP on L6 BOT "NONET_L-01_P-001" (solid, pour order 98): 18.991,28.074 19.463,28.545 19.466,28.545 19.466,29.442 18.92,29.988 16.52,29.988 15.859,29.326 15.859,26.365 15.666,26.172 12.96,26.172 12.925,26.137 12.925,25.664 16.296,25.664 18.224,27.593 18.224,28.253 18.516,28.545 18.988,28.074 18.995,28.074 19.466,28.545
NetD6_2 on L6 BOT "NONET_L-01_P-001" (solid, pour order 108): 68.434,8.554 68.347,8.468 62.987,8.468 ccw(c62.987,7.264) 62.135,8.115 61.19,7.169 ccw(c61.896,6.463) 60.897,6.463 60.897,5.387 cw(c60.628,5.387) 60.818,5.196 cw(c60.65,5.365) 60.649,5.127 58.594,5.127 cw(c58.594,5.374) 58.419,5.199 56.348,7.271 cw(c57.288,8.212) 55.958,8.212 55.958,11.295 65.172,11.295 cw(c65.172,10.42) 65.79,11.039 66.47,10.359 ccw(c67.076,10.965) 67.076,10.108 68.286,10.108 cw(c68.286,9.96) 68.391,10.064 cw(c68.286,9.96) 68.434,9.96
12V_EXP on L6 BOT "L6 BOT-12V_EXP" (solid, pour order 107): 36.375,4.508 ccw(c37.026,4.508) 37.026,3.858 39.838,3.858 40.958,3.858 ccw(c40.958,4.218) 41.318,4.218 41.318,5.378 cw(c41.868,5.378) 41.868,5.928 45.228,5.928 cw(c45.228,5.718) 45.438,5.718 45.438,4.868 ccw(c45.821,4.868) 45.821,4.485 48.573,4.485 ccw(c48.573,4.729) 48.745,4.556 ccw(c48.573,4.729) 48.817,4.729 48.817,5.491 ccw(c48.574,5.492) 48.745,5.664 ccw(c48.574,5.492) 48.573,5.735 cw(c48.573,5.894) 48.46,5.782 47.562,6.68 ccw(c46.481,5.6) 46.481,7.128 45.435,7.128 cw(c45.434,7.889) 44.896,7.351 43.827,8.419 cw(c44.3,8.892) 43.632,8.892 43.632,10.021 43.545,10.107 43.128,10.107 43.042,10.021 43.042,8.892 cw(c42.028,8.891) 42.745,8.175 42.293,7.723 cw(c41.943,8.072) 41.943,7.578 36.818,7.578 ccw(c36.818,7.135) 36.375,7.135
12V_EXP on L6 BOT "L6 BOT-12V_EXP 1" (solid, pour order 106): 36.375,4.508 ccw(c37.026,4.508) 37.026,3.858 39.838,3.858 40.958,3.858 ccw(c40.958,4.218) 41.318,4.218 41.318,5.378 cw(c41.868,5.378) 41.868,5.928 45.228,5.928 cw(c45.228,5.718) 45.438,5.718 45.438,4.868 ccw(c45.821,4.868) 45.821,4.485 48.573,4.485 ccw(c48.573,4.729) 48.745,4.556 ccw(c48.573,4.729) 48.817,4.729 48.817,5.491 ccw(c48.574,5.492) 48.745,5.664 ccw(c48.574,5.492) 48.573,5.735 cw(c48.573,5.894) 48.46,5.782 47.562,6.68 ccw(c46.481,5.6) 46.481,7.128 45.435,7.128 cw(c45.434,7.889) 44.896,7.351 43.827,8.419 cw(c44.3,8.892) 43.632,8.892 43.632,10.021 43.545,10.107 43.128,10.107 43.042,10.021 43.042,8.892 cw(c42.028,8.891) 42.745,8.175 42.293,7.723 cw(c41.943,8.072) 41.943,7.578 36.818,7.578 ccw(c36.818,7.135) 36.375,7.135
IR_LED_1_P on L6 BOT "L6 BOT-IR_LED_1_P" (solid, pour order 139): 40.83,17.107 40.947,16.99 41.967,16.99 cw(c41.967,16.211) 42.518,16.762 cw(c41.255,15.498) 43.042,15.498 43.042,13.885 ccw(c43.189,13.885) 43.085,13.781 ccw(c43.189,13.885) 43.189,13.737 43.545,13.737 43.632,13.824 43.632,15.23 43.64,15.238 43.64,16.19 43.865,16.414 47.244,16.414 48.822,17.991 48.822,18.868 48.723,18.967 47.947,18.967 46.37,17.39 44.124,17.39 43.724,17.79 40.947,17.79 40.83,17.673
efuse_STX_12V on L6 BOT "NONET_L-01_P-001" (solid, pour order 92): 18.516,10.748 18.516,8.936 16.22,6.64 16.22,4.63 20.796,4.63 22.14,5.974 22.14,11.622 21.814,11.948 20.662,11.948 18.989,10.275
STX_12V on L6 BOT "NONET_L-01_P-001" (solid, pour order 93): 18.991,10.526 19.463,10.997 19.466,10.997 19.466,11.64 ccw(c18.855,11.64) 19.287,12.073 18.779,12.581 ccw(c18.323,12.125) 18.323,12.77 16.476,12.77 ccw(c16.476,12.153) 15.859,12.153 15.859,8.817 15.625,8.583 12.919,8.583 12.74,8.404 12.74,8.187 12.925,8.002 16.182,8.002 18.224,10.045 18.224,10.705 18.516,10.997 18.988,10.526 18.995,10.526 19.466,10.997
12V_MOTOR_eFuse on L6 BOT "NONET_L-01_P-001" (solid, pour order 95): 18.516,19.543 18.516,17.731 16.22,15.435 16.22,13.423 21.616,13.423 22.14,13.948 22.14,20.417 21.814,20.743 20.662,20.743 18.989,19.07
5V_SLN_HD_eFuse on L6 BOT "NONET_L-01_P-001" (solid, pour order 96): 18.516,28.165 18.516,26.353 16.22,24.057 16.22,22.2 21.77,22.2 22.14,22.57 22.14,29.039 21.814,29.365 20.662,29.365 18.989,27.692
efuse_BUS_5V on L6 BOT "NONET_L-01_P-001" (solid, pour order 99): 18.516,37.132 18.516,35.32 15.84,32.644 15.84,30.896 21.5,30.896 22.14,31.537 22.14,38.006 21.814,38.332 20.662,38.332 18.989,36.659
BUS_5V on L6 BOT "NONET_L-01_P-001" (solid, pour order 100): 15.51,40.03 15.51,35.516 ccw(c15.673,35.515) 15.673,35.352 17.891,35.352 ccw(c17.891,35.686) 18.224,35.686 18.224,36.93 cw(c18.608,36.93) 18.337,37.201 18.385,37.25 cw(c18.516,37.119) 18.647,37.25 18.988,36.909 18.991,36.909 19.46,37.378 cw(c19.466,37.372) 19.475,37.372 19.475,40.03
IR_LED_1_P on L6 BOT "NONET_L-01_P-001" (solid, pour order 115): 47.98,18.017 48.485,18.017 cw(c48.485,17.09) 49.141,17.745 49.278,17.608 cw(c48.698,17.028) 49.518,17.028 49.518,9.719 cw(c48.744,9.719) 49.291,9.172 48.877,8.758 cw(c48.34,9.295) 48.34,8.535 47.21,8.535 ccw(c47.21,8.392) 47.067,8.392 47.067,7.428 ccw(c47.21,7.428) 47.21,7.285 50.105,7.285 50.558,7.738 50.558,17.949 ccw(c50.008,17.949) 50.397,18.338 49.987,18.748 ccw(c49.459,18.222) 49.459,18.967 47.98,18.967 ccw(c47.98,18.909) 47.922,18.909 47.922,18.075 ccw(c47.98,18.075)
NetD4_2 on L6 BOT "NONET_L-01_P-001" (solid, pour order 109): 42.362,8.554 42.275,8.467 36.915,8.467 ccw(c36.915,7.264) 36.063,8.115 35.118,7.169 ccw(c35.824,6.463) 34.825,6.463 34.825,5.387 cw(c34.556,5.387) 34.746,5.196 cw(c34.578,5.365) 34.578,5.126 32.523,5.126 cw(c32.522,5.374) 32.347,5.199 30.276,7.271 cw(c31.216,8.211) 29.886,8.211 29.886,11.295 39.1,11.295 cw(c39.1,10.42) 39.718,11.039 40.398,10.359 ccw(c41.004,10.965) 41.004,10.107 42.214,10.107 cw(c42.214,9.96) 42.319,10.064 cw(c42.214,9.96) 42.362,9.96
STX_12V on L6 BOT "NONET_L-01_P-001" (solid, pour order 97): 18.991,19.357 19.463,19.828 19.466,19.828 19.466,20.725 18.511,21.68 16.627,21.68 ccw(c16.627,20.911) 15.859,20.911 15.859,17.648 15.625,17.414 12.919,17.414 12.74,17.235 12.74,17.018 12.925,16.833 16.182,16.833 18.224,18.876 18.224,19.536 18.516,19.828 18.988,19.357 18.995,19.357 19.466,19.828
GND on L5 GND "GND_L05_P190" (solid, pour order 190): 33.399,17.186 34.415,18.203 39.563,18.203 ccw(c39.563,19.14) 40.5,19.14 40.5,21.4 ccw(c39.65,21.4) 39.65,22.25 34.813,22.25 31.9,19.337 31.901,19.336 28.814,19.336 28.814,14.686 29.964,13.536 29.964,11.386 30.914,11.386 30.914,13.544 32.064,14.694 32.064,17.186
GND on L2 GND "GND_L02_P186" (solid, pour order 186): 0,12.33 cw(c0.8,12.33) 0.8,13.13 1,13.13 ccw(c1,13.93) 1.8,13.93 1.8,77.35 ccw(c1,77.35) 1,78.15 0.8,78.15 cw(c0.8,78.95) 0,78.95 0,86.8 cw(c3.2,86.8) 3.193,90 3.175,90 19.989,90 cw(c19.989,89.2) 20.789,89.2 ccw(c21.589,89.2) 21.589,88.4 21.59,88.399 42.015,88.4 71.399,88.4 71.389,88.4 ccw(c71.389,89.2) 72.189,89.2 cw(c72.989,89.2) 72.989,90 89.789,90 89.807,90 cw(c89.8,86.8) 93,86.807 93,77.307 cw(c92.2,77.307) 92.2,76.507 ccw(c92.2,75.707) 91.4,75.707 91.4,14.8 ccw(c92.2,14.8) 92.2,14 cw(c92.2,13.2) 93,13.2 93,3.2 cw(c89.8,3.2) 89.8,0 73,0 cw(c73,0.8) 72.2,0.8 ccw(c71.4,0.8) 71.4,1.6 71.399,1.6 50.975,1.6 21.59,1.6 21.6,1.6 ccw(c21.6,0.8) 20.8,0.8 cw(c20,0.8) 20,0 3.2,0 cw(c3.2,3.2) 0,3.2

## Keep-outs
Keep-Out Layer:
  lines w0.2: 1.8,77.35 1.8,13.93 cw(c1,13.93) 1,13.13 0.8,13.13 ccw(c0.8,12.33) 0,12.33 0,3.2 ccw(c3.2,3.2) 3.2,0 19.99,0 ; 1.8,77.35 ccw(c1,77.35) 1,78.15 0.8,78.15 cw(c0.8,78.95) 0,78.95 0,86.8 cw(c3.2,86.8) 3.193,90 ; 3.175,90 19.964,90 ; 19.989,90 cw(c19.989,89.2) 20.789,89.2 ccw(c21.589,89.2) 21.589,88.4 ; 20,0 ccw(c20,0.8) 20.8,0.8 cw(c21.6,0.8) 21.6,1.6 ; 21.59,1.6 50.975,1.6 71.399,1.6 cw(c71.4,0.8) 72.2,0.8 ccw(c73,0.8) 73,0 ; 21.59,88.399 42.015,88.4 71.399,88.4 ; 71.389,88.4 ccw(c71.389,89.2) 72.189,89.2 cw(c72.989,89.2) 72.989,90 ; 73,90 89.789,90 ; 73.025,0 89.815,0 ; 89.8,0 ccw(c89.8,3.2) 93,3.2 93,13.2 ccw(c92.2,13.2) 92.2,14 cw(c92.2,14.8) 91.4,14.8 ; 89.807,90 cw(c89.8,86.8) 93,86.807 93,77.307 cw(c92.2,77.307) 92.2,76.507 ccw(c92.2,75.707) 91.4,75.707 ; 91.4,14.8 91.4,75.707

## Silkscreen, mask and mechanical layers (free items; w line width, h text height)
Top Overlay:
  drawing of 30 lines, arcs and shapes, not listed
  text "FLOW 1" at 53.2,81.912 h1
  text "BATTERY" at 7.2,81.5 h1
  text "SOLENOID 1 - 4" at 82.5,80.112 h1
  text "HD4 CH 1-2" at 18.275,79.712 h1
  text "CAM 2" at 82.599,69.312 h1
  text "NTC" at 82.888,53.9 h1 r90
  text "MOTOR 2" at 79.8,39.012 h1
  text "LIMIT - L" at 79.7,21.826 h1
  text "IR LED 1" at 87.5,10.6 h1
  text "12V_EXP" at 40.76,4.2 h1 r90
  text "12V_MOTOR" at 41.862,4.2 h1 r90
  text "5V_SLN_HD" at 42.963,4.2 h1 r90
  text "5V_EXP" at 44.053,4.2 h1 r90
  text "3.3V_COM" at 45.155,4.2 h1 r90
  text "3.3V_MOTOR" at 46.258,4.2 h1 r90
  text "3.3V_MCU" at 47.36,4.2 h1 r90
Bottom Overlay:
  drawing of 18 lines, arcs and shapes, not listed
  text "HD4 CH 3-4" at 25.3,79.312 h1
  text "HD CH 1" at 42,79.312 h1
  text "FLOW 2" at 67.5,79.312 h1
  text "SOLENOID 5 - 8" at 84.5,79.313 h1
  text "CAM 1" at 85.176,69.312 h1
  text "HEATER" at 83.3,53.1 h1
  text "MOTOR 1" at 83.3,49.912 h1
  text "NC" at 62.5,47.112 h1
  text "3V3_MCU" at 62.5,44.473 h1
  text "GND" at 62.5,41.962 h1
  text "TRACESWO" at 62.5,39.451 h1
  text "TSWCLK" at 62.5,36.941 h1
  text "nRESET" at 62.5,34.434 h1
  text "NC" at 62.5,31.923 h1
  text "SWDIO" at 62.5,29.412 h1
  text "BEE-DAL_EXP V1.0" at 75.838,27.032 h1.2
  text "Checked by: Bao Bui" at 76.205,25.708 h1.2
  text "Approved by: Vu Pham" at 76.806,24.386 h1.2
  text "Designed by: Duy Nguyen" at 77.523,23.057 h1.2
  text "LIMIT - U" at 83.467,21.826 h1
  text "IR LED 2" at 90.962,10.5 h1

## Text inside footprints (layer, text, board x,y; h text height)
U17: Top Assembly "*" at 64.735,73.161 h1 r270
U35: Top Assembly "*" at 73.082,77.681 h1